# EAGLE board KarasolboxCont (EAGLE 8.0.2)
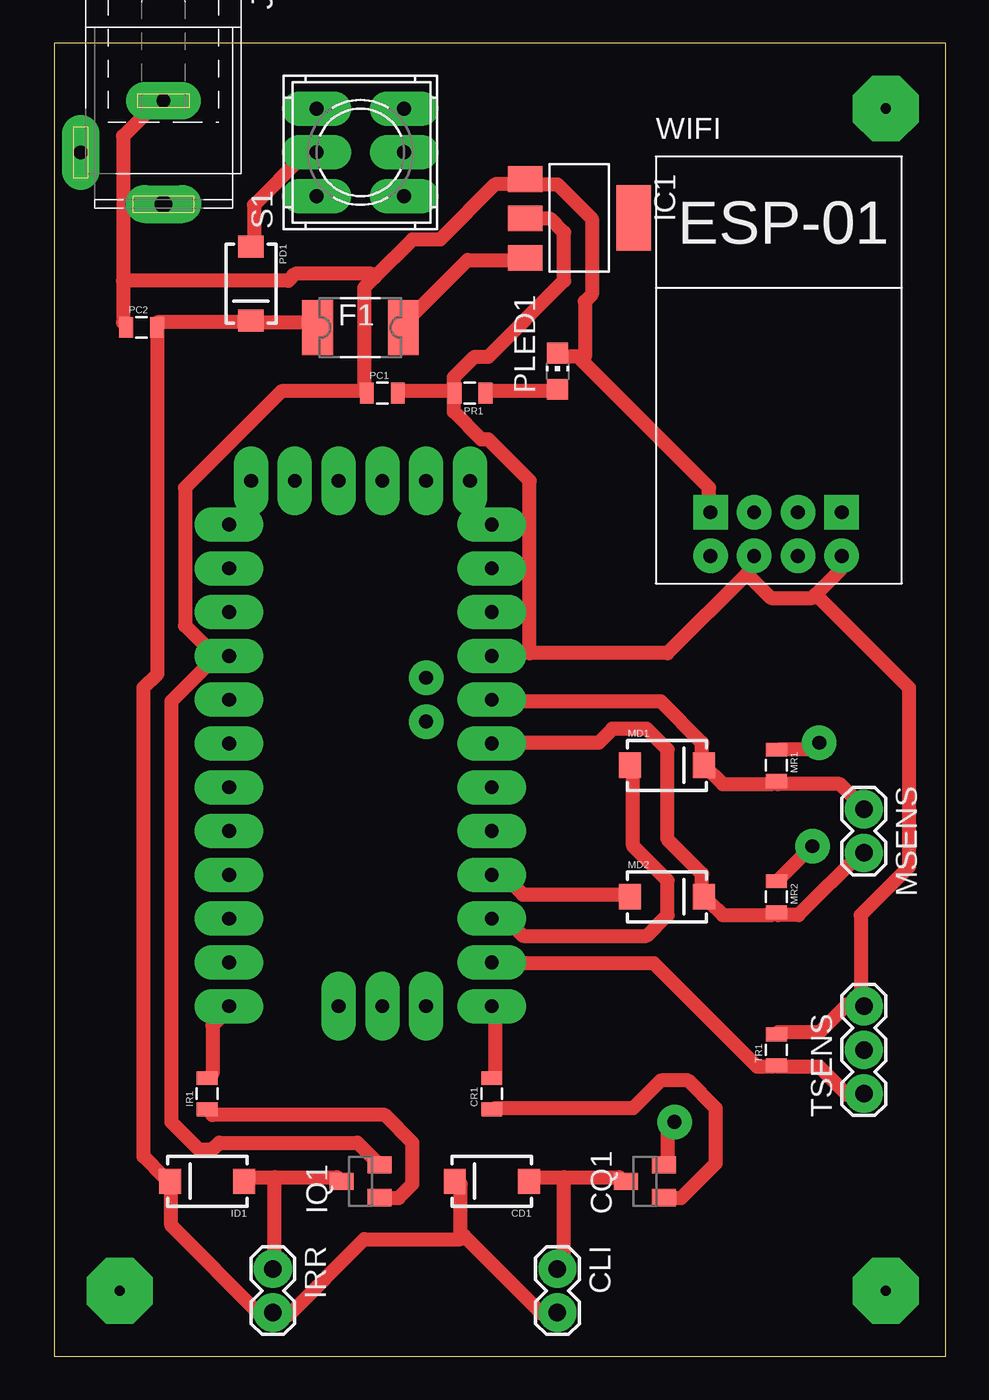
[diagram p0: board, top side]
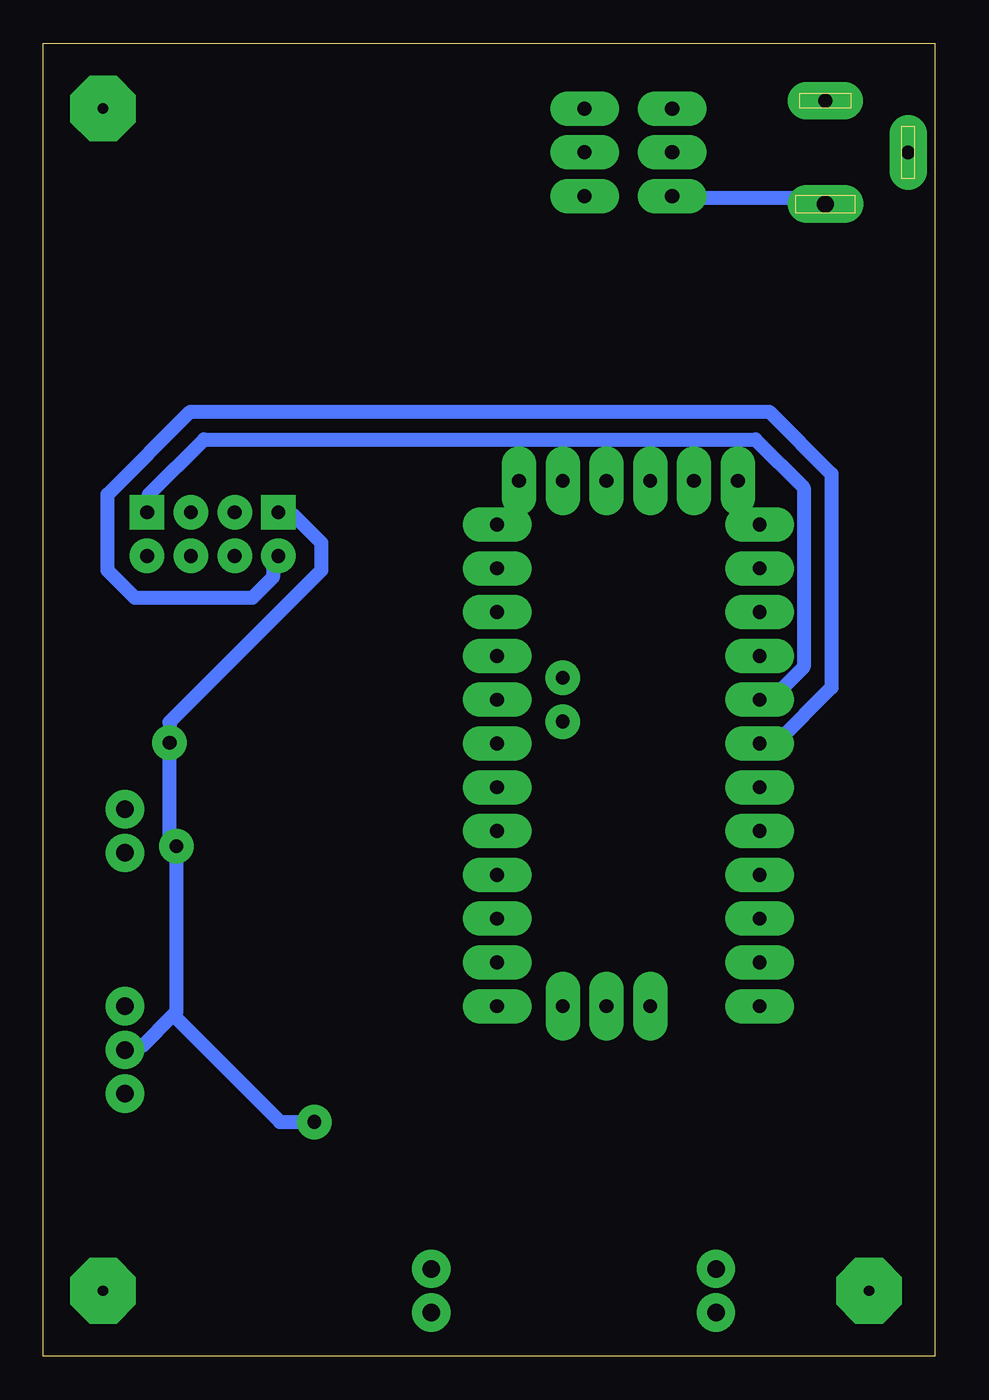
[diagram p1: board, bottom side, seen from below]

Size 51.74 x 76.19 mm. Coordinates in mm from the lower left corner, seen from the top.
Outline: 0,0 51.74,0 51.74,76.19 0,76.19 0,0
Copper layers (1*16): Top 0.035mm / dielectric 1.5mm / Bottom 0.035mm
Design rules "default *": minimum track width 0.8mm, minimum drill 0.8mm, track to track 0.8mm, track to pad 0.8mm, pad to pad 0.45mm, via to via 0.8mm, smd to smd 8mil, copper to edge 40mil, drill to drill 8mil, minimum pad ring 0.6mm, minimum via ring 0.6mm, stop-mask expansion 4mil, vias tented up to drill 0mil, thermal gap 10mil
Net classes: 0 default: width 0.3 mm, drill 0.5 mm, clearance 0.25 mm

## Footprints (pad centres in the part's own frame; a part is rotated, then mirrored left to right if it is on the bottom)
SMA-DIODE = smd 1.27 x 1.47: A -2.15,0; C 2.15,0
1X02 = drill 1.016: 1 0,0; 2 2.54,0
SOT23 = smd 1 x 1.4: 1 -0.95,-1.1; 2 0.95,-1.1; 3 0,1.1
0805 = smd 0.8 x 1.2: 1 -0.9,0; 2 0.9,0
1820 = smd 1.78 x 3.2: 1 -2.49,0; 2 2.49,0
SOT223 = smd 1.499 x 2.007: 1 -2.261,-3.15; 2 0.025,-3.15; 3 2.311,-3.15 | smd 3.81 x 2.007: 4 0,3.15
SPC4078 = drill 0.8 pad 2.184 long: 1 -3,0; 2 0,-4.8 | drill 1 pad 2.184 long: 3 3,0
CHIP-LED0805 = smd 1.2 x 1.2: A 0,-1.05; C 0,1.05
9077-2 = drill 0.813 long: 1 -2.54,2.54; 2 0,2.54; 3 2.54,2.54; 4 -2.54,-2.54; 5 0,-2.54; 6 2.54,-2.54
1X03 = drill 1.016 pad 1.88: 1 0,0; 2 2.54,0; 3 5.08,0
ABK-PRO-MINI = drill 0.8 long: A0 10.16,-3.81; A1 10.16,-6.35; A2 10.16,-8.89; A3 10.16,-11.43; A6 3.81,-21.59; A7 6.35,-21.59; D2 -5.08,-3.81; D3 -5.08,-6.35; D4 -5.08,-8.89; D5 -5.08,-11.43; D6 -5.08,-13.97; D7 -5.08,-16.51; D8 -5.08,-19.05; D9 -5.08,-21.59; D10 10.16,-21.59; D11 10.16,-19.05; D12 10.16,-16.51; D13 10.16,-13.97; DTR 8.89,8.89; GND 10.16,3.81; GND1 -5.08,-1.27; GND2 -3.81,8.89; GND3 -1.27,8.89; GND4 1.27,-21.59; RAW 10.16,6.35; RST 10.16,1.27; RST1 -5.08,1.27; RX1 -5.08,3.81; RX1-1 3.81,8.89; TX0 -5.08,6.35; TX0-1 6.35,8.89; VCC 10.16,-1.27; VCC1 1.27,8.89 | drill 0.8: A4 6.35,-5.08; A5 6.35,-2.54
ESP01 = drill 0.8: CH_PD -1.285,-8.178; GPIO0 1.255,-5.638; GPIO2 -1.285,-5.638; RST 1.255,-8.178; TX -3.825,-8.178; VCC 3.795,-8.178 | drill 0.8 square: GND -3.825,-5.638; RX 3.795,-5.638

## Placement (x,y rotation side)
CD1  [SMA-DIODE]  25.4,10.16 180 top
CLI  [1X02]  29.21,5.08 270 top
CQ1  2N5551  [SOT23]  34.29,10.16 90 top
CR1  1K  [0805]  25.4,15.24 90 top
F1  1A  [1820]  17.78,59.69 0 top
IC1  REG1117  [SOT223]  30.48,66.04 270 top
ID1  [SMA-DIODE]  8.89,10.16 180 top
IQ1  2N5551  [SOT23]  17.78,10.16 90 top
IR1  1K  [0805]  8.89,15.24 90 top
IRR  [1X02]  12.7,5.08 270 top
J2  [SPC4078]  6.35,69.85 270 top
MD1  [SMA-DIODE]  35.56,34.29 0 top
MD2  [SMA-DIODE]  35.56,26.67 0 top
MR1  4700  [0805]  41.91,34.29 270 top
MR2  4700  [0805]  41.91,26.67 270 top
MSENS  [1X02]  46.99,31.75 270 top
PC1  10uf  [0805]  19.05,55.88 0 top
PC2  100uf  [0805]  5.08,59.69 0 top
PD1  [SMA-DIODE]  11.43,62.23 270 top
PLED1  [CHIP-LED0805]  29.21,57.15 0 top
PR1  220  [0805]  24.13,55.88 180 top
S1  9077-2  [9077-2]  17.78,69.85 90 top
TR1  4700  [0805]  41.91,17.78 90 top
TSENS  [1X03]  46.99,15.24 90 top
U$1  ABK-PRO-MINI  [ABK-PRO-MINI]  15.24,41.91 0 top
WIFI  ESP01  [ESP01]  41.91,54.61 0 top

## Library data of the parts
CD1 ID1 MD1 MD2 PD1 = SparkFun-DiscreteSemi
CLI IRR MSENS = SparkFun
CQ1 IQ1 = semicon-smd-ipc
CR1 IR1 MR1 MR2 PR1 TR1 = SparkFun-Passives
F1 = _hhn_PtcFuses_Siba_r500_Ozan
IC1 = burr-brown; MPN: REG1117; OC_FARNELL: 1097566; OC_NEWARK: 14P6981
J2 = con-jack; OC_FARNELL: unknown; OC_NEWARK: unknown
PC1 PC2 = SparkFun-Capacitors
PLED1 = led
S1 = switch-misc
TSENS = SparkFun-Connectors
U$1 = Arduino-clone
WIFI = esp8266modules

## Nets
A0: MD1.C MR1.2 MSENS.1 U$1.A0
A1: MD2.C MR2.2 MSENS.2 U$1.A1
D2: U$1.D2 WIFI.RX
D3: U$1.D3 WIFI.TX
D9: IR1.2 U$1.D9
D10: CR1.2 U$1.D10
D11: TR1.1 TSENS.1 U$1.D11
D12: MD1.A U$1.D12
D13: MD2.A U$1.D13
GND: CQ1.2 IC1.1 IQ1.2 J2.1 MR1.1 MR2.1 PC1.1 PC2.1 PLED1.C TSENS.2 U$1.GND1 WIFI.GND
N$1: F1.2 IC1.3
N$2: CD1.A CLI.1 CQ1.3
N$3: PD1.A S1.2
N$5: ID1.A IQ1.3 IRR.1
N$6: IQ1.1 IR1.1
N$7: J2.3 S1.1
N$10: CQ1.1 CR1.1
N$11: PLED1.A PR1.1
RAW [v]: CD1.C CLI.2 F1.1 ID1.C IRR.2 PC2.2 PD1.C
VCCSRV: IC1.2 PC1.2 PR1.2 TR1.2 TSENS.3 U$1.VCC WIFI.CH_PD WIFI.VCC

## Tracks (layer width: path | path; a pad name or v marks a point on that pad's centre or on a via)
A0
  Top 0.8: MSENS.1 46.8,32 45.6,33.2 42,33.2 MR1.2 41.6,33.2 38.8,33.2 MD1.C 37.6,34.4 37.6,35.6 35.2,38 25.6,38 U$1.A0
A1
  Top 0.8: MSENS.2 46.8,29.2 43.2,25.6 42,25.6 MR2.2 41.6,25.6 38.8,25.6 38,26.4 MD2.C 37.6,26.8 37.6,28 35.6,30 35.6,35.2 34.4,36.4 32.4,36.4 31.6,35.6 25.6,35.6 U$1.A1
D2
  Bottom 0.8: U$1.D2 10,38.4 9.2,38.4 7.6,40 7.6,50.4 10.4,53.2 42.4,53.2 45.6,50 45.6,49.2 WIFI.RX
D3
  Bottom 0.8: U$1.D3 10,35.6 9.2,35.6 6,38.8 6,51.2 9.6,54.8 43.2,54.8 48,50 48,45.6 46.4,44 39.6,44 38.4,45.2 38.4,46.4 WIFI.TX
D9
  Top 0.8: IR1.2 9.2,16.4 9.2,19.2 10,20 U$1.D9
D10
  Top 0.8: CR1.2 25.6,16.4 25.6,20 U$1.D10
D11
  Top 0.8: TSENS.1 46.8,15.2 46,15.2 44.4,16.8 42,16.8 TR1.1 41.6,16.8 40.8,16.8 34.8,22.8 25.6,22.8 U$1.D11
D12
  Top 0.8: MD1.A 33.6,34 33.6,29.6 35.6,27.6 35.6,25.6 34.4,24.4 27.2,24.4 26.4,25.2 25.6,25.2 U$1.D12
D13
  Top 0.8: MD2.A 33.2,26.8 27.2,26.8 26.4,27.6 25.6,27.6 U$1.D13
GND  (via drill 0.8)
  Top 0.8: 9,40.2 9.2,40.4 10,40.4 U$1.GND1 | 9,40.2 6.8,38 6.8,13.6 8.4,12 9.2,12 9.6,12.4 17.6,12.4 18.8,11.2 IQ1.2 | v44,29.6 42,27.6 MR2.1 | v44.4,35.6 44,35.2 42,35.2 MR1.1 | v36,13.6 35.6,13.2 35.6,11.2 CQ1.2 | 30.6,57.8 38,50.4 38,49.2 WIFI.GND | 30.6,57.8 30.4,58 29.6,58 PLED1.C | 4,62.4 4,70.8 6,72.8 J2.1 | 4,62.4 4,60 PC2.1 | 18,56 18,62 18.6,62.6 | 18.6,62.6 20.8,64.8 22.4,64.8 25.6,68 27.2,68 IC1.1 27.6,68 29.2,68 31.2,66 31.2,61.6 30.8,61.2 30.8,58 30.6,57.8 | 18,56 PC1.1 | 4,62.4 13.6,62.4 14,62.8 18.4,62.8 18.6,62.6 | 18,56 13.2,56 7.6,50.4 7.6,42.4 8.8,41.2 8.8,40.4 9,40.2
  Bottom 0.8: 44.2,19.8 46,18 46.8,18 TSENS.2 | 44.2,19.8 44,20 v44,29.6 44.4,30 v44.4,35.6 44.4,36.8 35.6,45.6 35.6,47.2 37.2,48.8 38,48.8 WIFI.GND | v36,13.6 38,13.6 44.2,19.8
N$1
  Top 0.8: IC1.3 27.2,63.6 24,63.6 20.4,60 F1.2
N$2
  Top 0.8: 29.6,10.4 27.6,10.4 CD1.A | 29.6,10.4 32.8,10.4 CQ1.3 | 29.6,10.4 29.6,5.2 CLI.1
N$3
  Top 0.8: PD1.A 11.6,64.4 11.6,66.8 14.4,69.6 15.2,69.6 S1.2
N$4  (via drill 0.6 pad 3.81)
  other vias: 3.81,3.81
N$5
  Top 0.8: 12.8,10.4 11.2,10.4 ID1.A | 12.8,10.4 16.4,10.4 IQ1.3 | 12.8,10.4 12.8,5.2 IRR.1
N$6
  Top 0.8: IR1.1 9.2,14 19.2,14 20.8,12.4 20.8,10 20,9.2 19.2,9.2 IQ1.1
N$7
  Bottom 0.8: S1.1 15.2,67.2 6.4,67.2 J2.3
N$8  (via drill 0.6 pad 3.81)
  other vias: 48.26,3.81
N$9  (via drill 0.6 pad 3.81)
  other vias: 48.26,72.39
N$10
  Top 0.8: CR1.1 25.6,14.4 33.6,14.4 35.2,16 36.8,16 38.4,14.4 38.4,11.2 36.4,9.2 35.6,9.2 CQ1.1
N$11
  Top 0.8: PR1.1 25.2,56 29.2,56 PLED1.A
RAW
  Top 0.8: 23.8,7 28.4,2.4 29.2,2.4 CLI.2 | 23.8,7 23.6,7.2 23.6,10 CD1.C | F1.1 15.2,60 11.6,60 PD1.C 11.2,60 6,60 PC2.2 6,59.6 6,39.6 5.2,38.8 5.2,11.6 6.4,10.4 ID1.C 6.8,10 6.8,7.6 12,2.4 12.4,2.4 IRR.2 12.8,2.4 13.6,2.4 18,6.8 23.6,6.8 23.8,7
VCCSRV
  Top 0.8: PC1.2 20,56 23.2,56 PR1.2 | IC1.2 27.6,66 28.8,66 29.6,65.2 29.6,62.4 25.2,58 24.4,58 23.2,56.8 23.2,56.4 PR1.2 | TR1.2 42,18.8 44.4,18.8 46,20.4 46.8,20.4 TSENS.3 46.8,20.8 46.8,25.6 49.6,28.4 49.6,38.8 44.2,44.2 | 27.6,40.8 35.6,40.8 40.2,45.4 | 27.6,40.8 25.6,40.8 U$1.VCC | 40.2,45.4 40.4,45.6 40.4,46.4 WIFI.CH_PD | 44.2,44.2 44,44 41.6,44 40.2,45.4 | 44.2,44.2 45.6,45.6 45.6,46.4 WIFI.VCC | 27.6,40.8 27.6,50.8 25.2,53.2 24.8,53.2 23.2,54.8 23.2,55.6 PR1.2